# EAGLE board EXP (EAGLE 5.11)
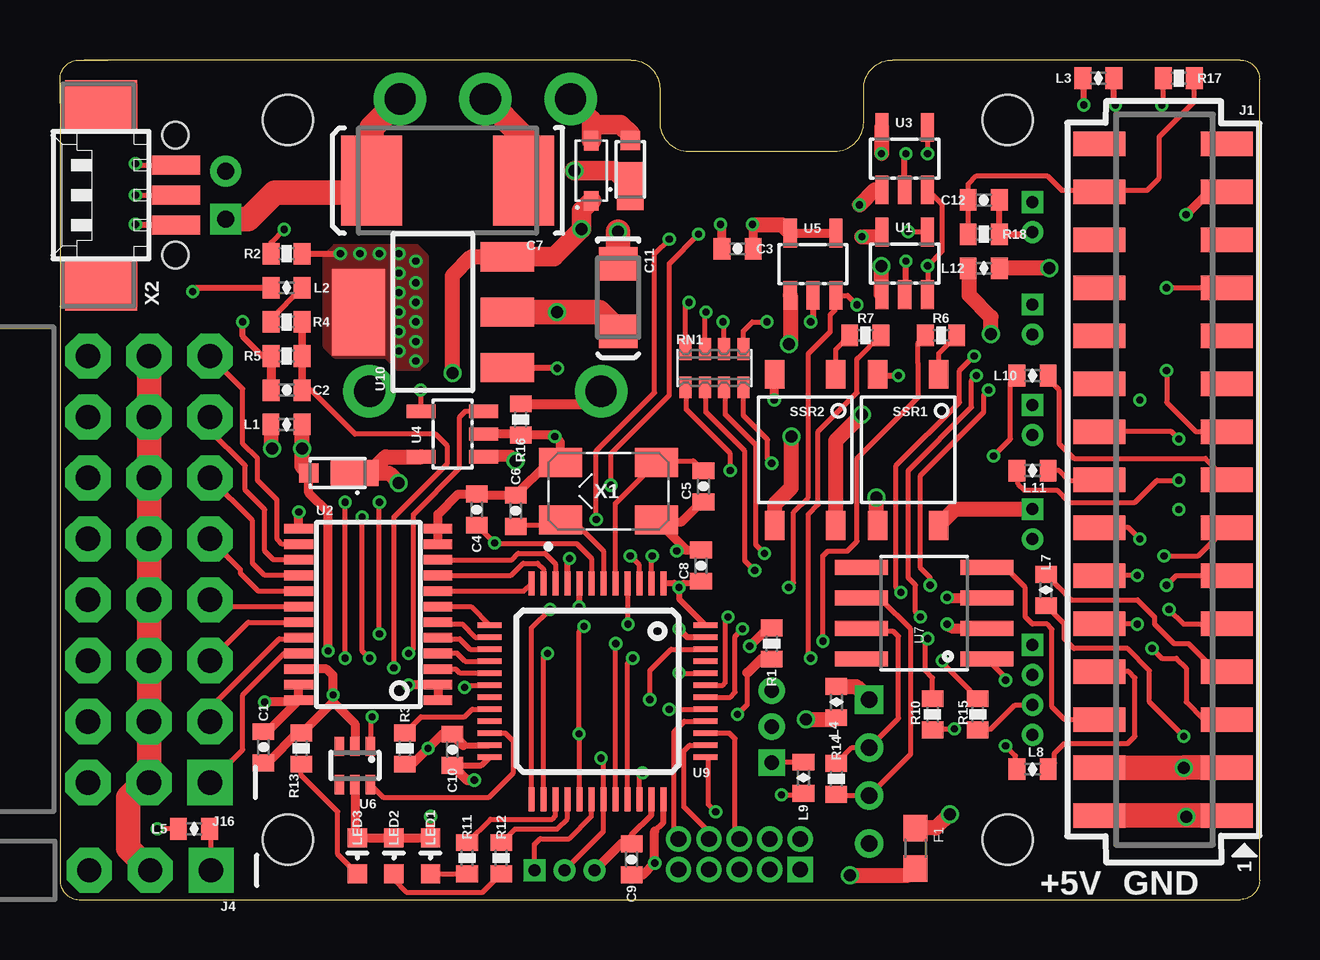
[diagram p0: board, top side]
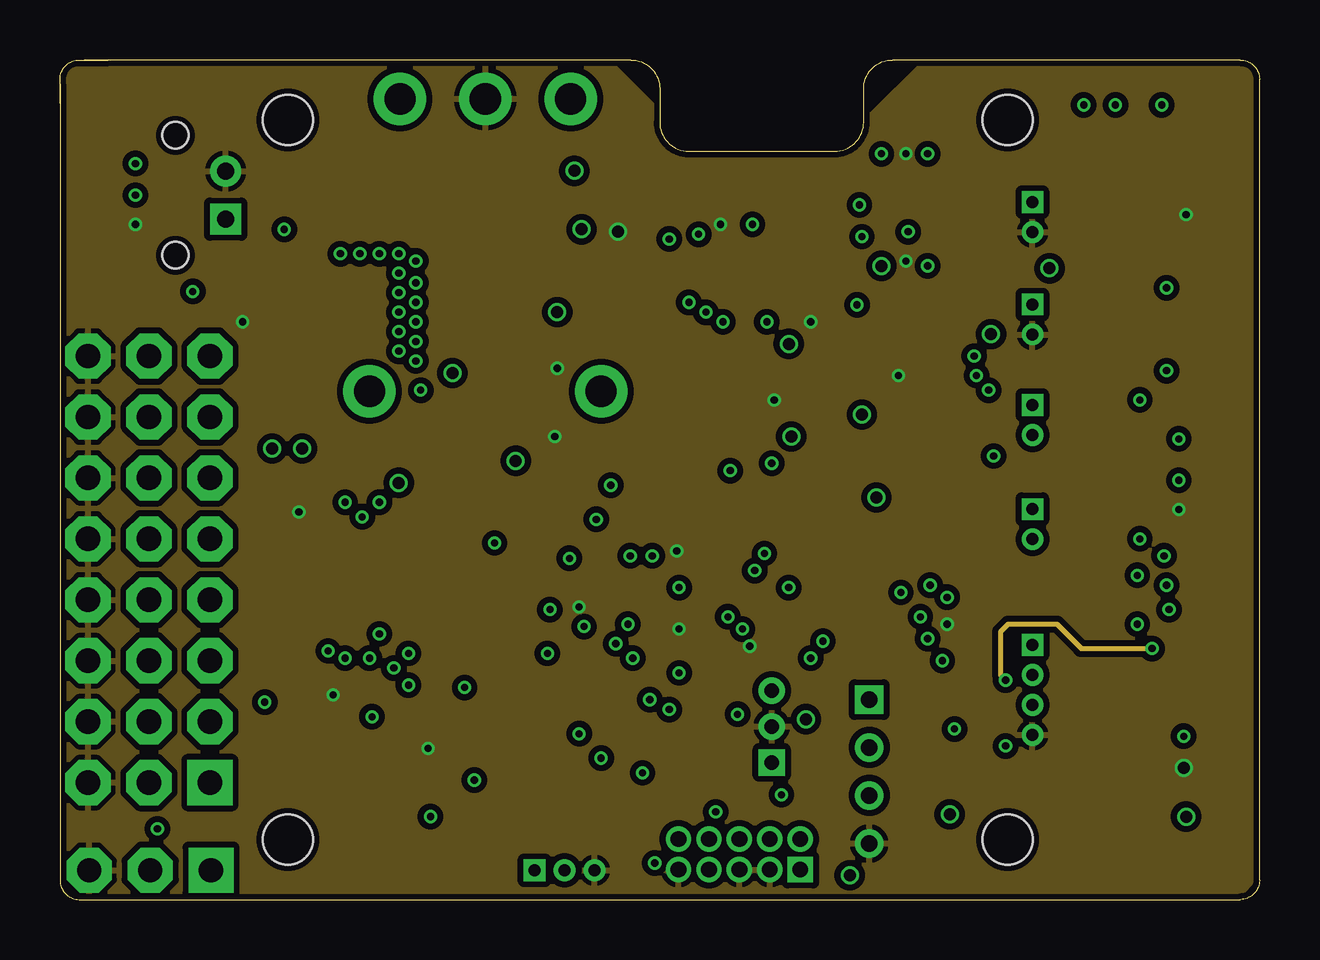
[diagram p1: board, inner layer Route2]
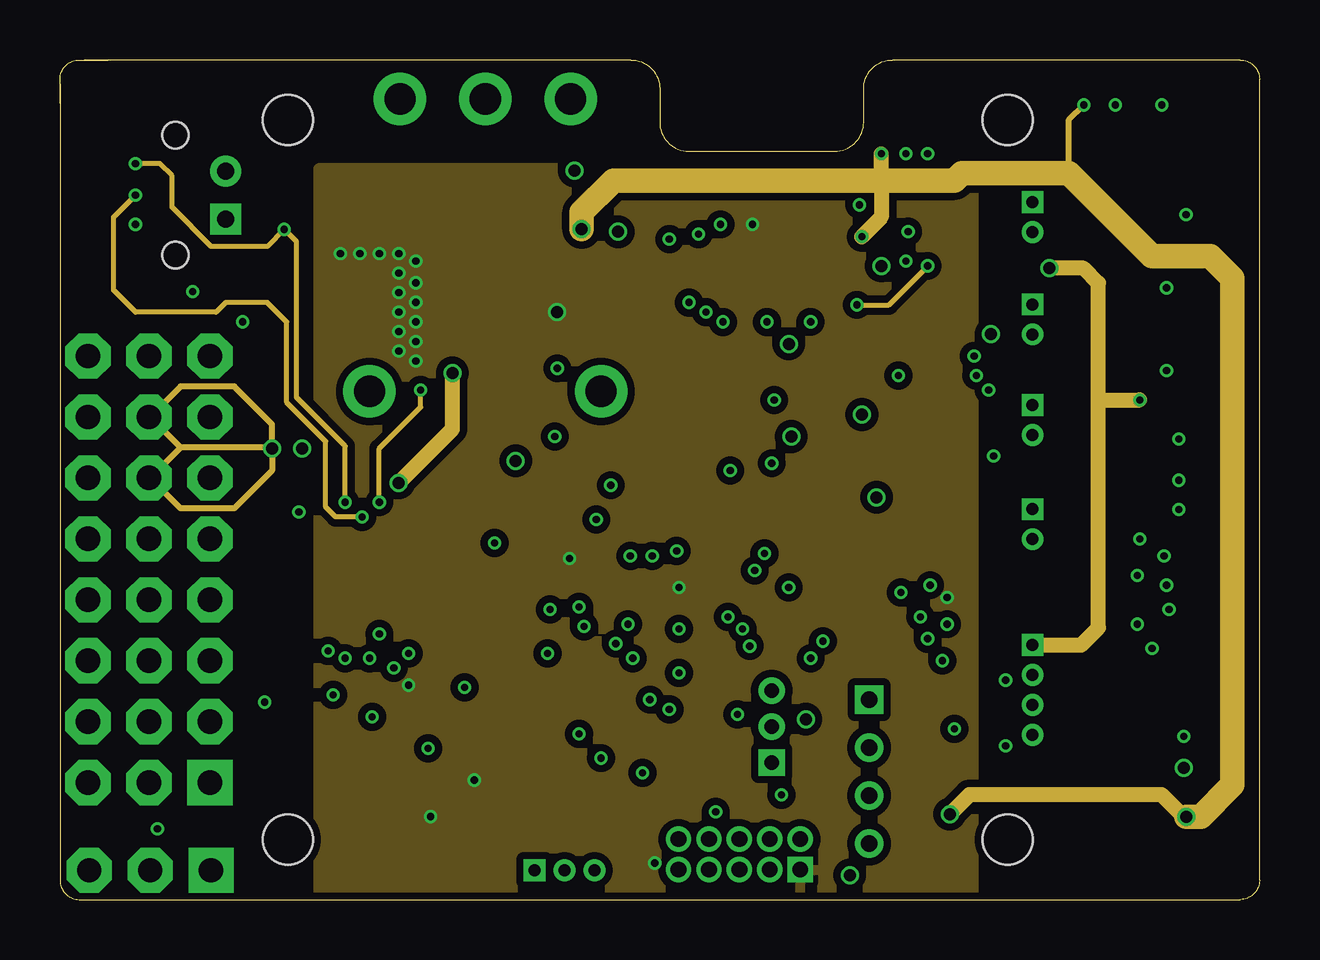
[diagram p2: board, inner layer Route15]
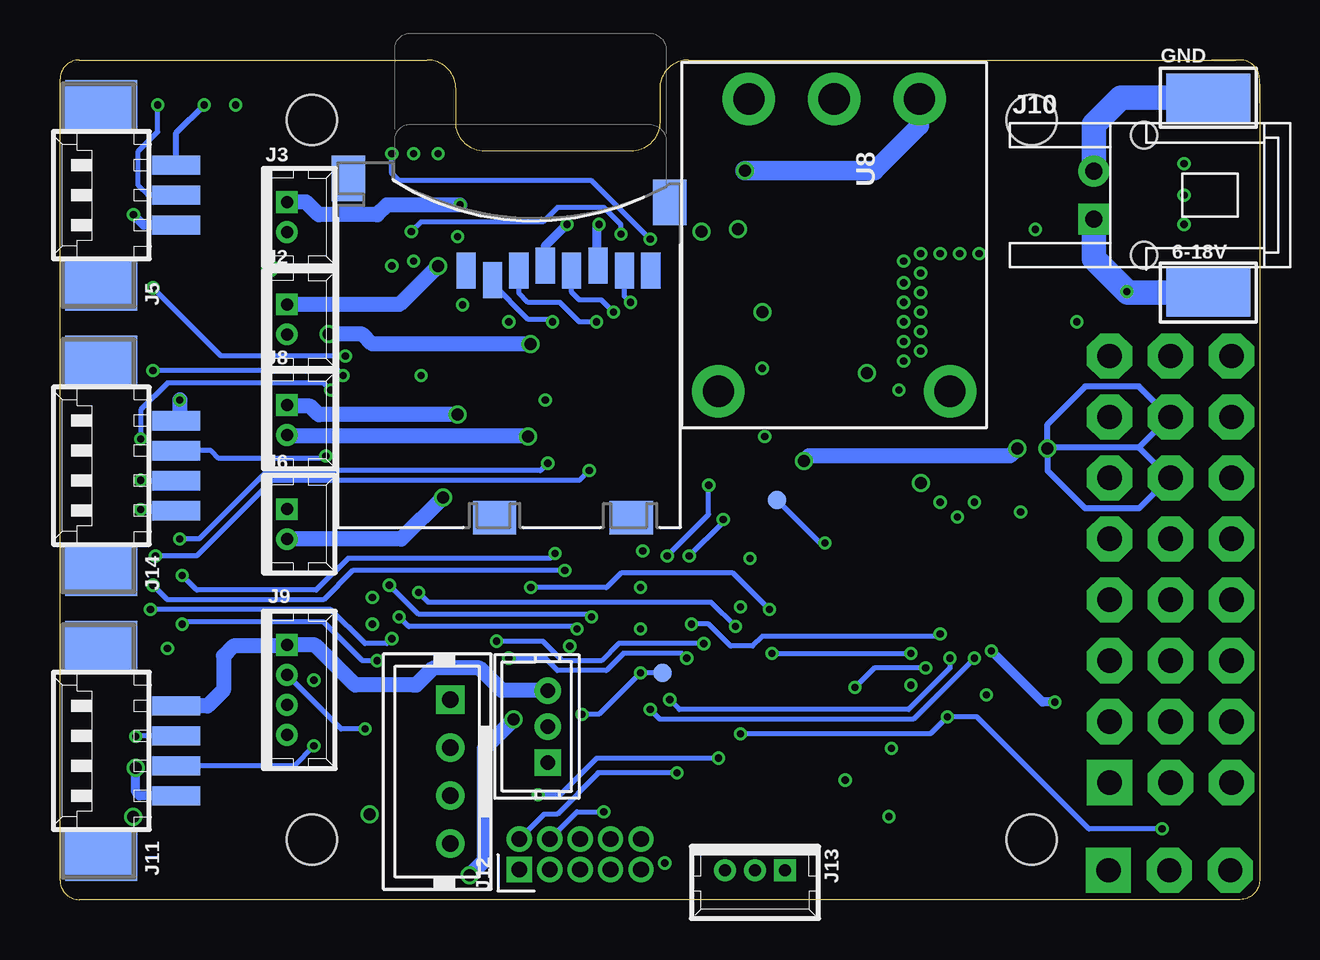
[diagram p3: board, bottom side, seen from below]

Size 50 x 35 mm. Coordinates in mm from the lower left corner, seen from the top.
Outline: 0,33.2 0,34.2 arc-90 0.8,35 2,35
Outline: 0,34 0,0.8 arc90 0.8,0 49.2,0 arc90 50,0.8 50,34.2 arc90 49.2,35 34.7,35 arc90 33.5,33.8 33.5,32.4 arc-90 32.3,31.2 26.2,31.2 arc-90 25,32.4 25,33.8 arc90 23.8,35 1,35
Copper layers (1*2*15*16): Top 0.035mm / dielectric 0.5mm / Route2 0.035mm / dielectric 0.5mm / Route15 0.035mm / dielectric 0.5mm / Bottom 0.035mm
Design rules "pixhawk2 *": minimum track width 0.15mm, minimum drill 0.3mm, track to track 0.15mm, track to pad 0.15mm, pad to pad 0.15mm, via to via 0.15mm, smd to smd 0.15mm, copper to edge 0.2mm, drill to drill 0.2mm, minimum pad ring 0.125mm, minimum via ring 0.125mm, stop-mask expansion 0.075mm, vias tented up to drill 0.31mm, thermal gap 8mil
Net classes: 0 default: width 0.203 mm, clearance 0.203 mm; 1 power: width 0.254 mm, drill 0.3 mm, clearance 0.203 mm

## Footprints (pad centres in the part's own frame; a part is rotated, then mirrored left to right if it is on the bottom)
3,5-2 = smd 2 x 3.5: 1 0,0
0402-CAP = smd 0.7 x 0.9: 1 -0.65,0; 2 0.65,0
EIA7343 = smd 2.55 x 3.75: A 3.17,0; C -3.17,0
EIA3216 = smd 1.4 x 1.6: A 1.4,0; C -1.4,0
MICROSMP = smd 0.8 x 0.8: ANODE 0.65,0 | smd 2 x 1.1: CATHODE -1.25,0
SOD323 = smd 0.8 x 0.6: A 1.25,0; C -1.25,0
0603 = smd 1.1 x 1: 1 -0.85,0; 2 0.85,0
HEADER_2MM_2X15_REVERSE = smd 1.02 x 2.16: 1 -14,-2.655; 2 -14,2.655; 3 -12,-2.655; 4 -12,2.655; 5 -10,-2.655; 6 -10,2.655; 7 -8,-2.655; 8 -8,2.655; 9 -6,-2.655; 10 -6,2.655; 11 -4,-2.655; 12 -4,2.655; 13 -2,-2.655; 14 -2,2.655; 15 0,-2.655; 16 0,2.655; 17 2,-2.655; 18 2,2.655; 19 4,-2.655; 20 4,2.655; 21 6,-2.655; 22 6,2.655; 23 8,-2.655; 24 8,2.655; 25 10,-2.655; 26 10,2.655; 27 12,-2.655; 28 12,2.655; 29 14,-2.655; 30 14,2.655
53047-02 = drill 0.5 pad 0.9 square: 1 -0.625,0 | drill 0.5 pad 0.9 round: 2 0.625,0
3X1RA = drill 1.016 pad 1.88 square: 1 -5.08,0 | drill 1.016 pad 1.88 octagon: 2 -2.54,0; 3 0,0
53261-03 = smd 0.8 x 2: 1 1.25,-2.5; 2 0,-2.5; 3 -1.25,-2.5 | smd 2.1 x 3: S1 3.75,0.625; S2 -3.75,0.625
B3B-ZR = drill 0.6 pad 1.1 square: 1 -1.5,0 | drill 0.6 pad 1.1 round: 2 0,0; 3 1.5,0
53047-04 = drill 0.5 pad 0.9 square: 1 -1.875,0 | drill 0.5 pad 0.9 round: 2 -0.625,0; 3 0.625,0; 4 1.875,0
S02B-PASK-2 = drill 0.7 pad 1.3 square: 1 1,0 | drill 0.7 pad 1.3 round: 2 -1,0 | hole 1.1: -2.5,2.1; 2.5,2.1
53261-04 = smd 0.8 x 2: 1 1.875,-2.5; 2 0.625,-2.5; 3 -0.625,-2.5; 4 -1.875,-2.5 | smd 2.1 x 3: S1 4.375,0.625; S2 -4.375,0.625
FTSH-105-01-XXX-DV = drill 0.65 pad 1.06 square: 1 0,0 | drill 0.65 pad 1.06 round: 2 0,1.27; 3 1.27,0; 4 1.27,1.27; 5 2.54,0; 6 2.54,1.27; 7 3.81,0; 8 3.81,1.27; 9 5.08,0; 10 5.08,1.27
53047-03 = drill 0.5 pad 0.9 square: 1 -1.25,0 | drill 0.5 pad 0.9 round: 2 0,0; 3 1.25,0
B4B-PH-K-S = drill 0.7 pad 1.2 square: 1 6,0 | drill 0.7 pad 1.2 round: 2 4,0; 3 2,0; 4 0,0
3X8RA = drill 1.016 pad 1.88 square: 1 -1.27,8.89 | drill 1.016 pad 1.88 octagon: 2 1.27,8.89; 3 3.81,8.89; 4 -1.27,6.35; 5 1.27,6.35; 6 3.81,6.35; 7 -1.27,3.81; 8 1.27,3.81; 9 3.81,3.81; 10 -1.27,1.27; 11 1.27,1.27; 12 3.81,1.27; 13 -1.27,-1.27; 14 1.27,-1.27; 15 3.81,-1.27; 16 -1.27,-3.81; 17 1.27,-3.81; 18 3.81,-3.81; 19 -1.27,-6.35; 20 1.27,-6.35; 21 3.81,-6.35; 22 -1.27,-8.89; 23 1.27,-8.89; 24 3.81,-8.89
0402-IND = smd 0.7 x 0.9: 1 -0.65,0; 2 0.65,0
LED-0603 = smd 0.8 x 0.8: A 0,-0.75; C 0,0.75
MICROSD = smd 0.8 x 1.5: 1 -1.94,2.7; 2 -0.84,2.3; 3 0.26,2.7; 4 1.36,2.9; 5 2.46,2.7; 6 3.56,2.9; 7 4.66,2.7; 8 5.76,2.7 | smd 1.4 x 1.9: NC -6.85,6.55; NC3 6.55,5.55 | smd 1.8 x 1.4: NC1 -0.75,-7.6; NC2 4.95,-7.6
0402-RES = smd 0.7 x 0.9: 1 -0.65,0; 2 0.65,0
CTS742C083 = smd 0.5 x 0.9: 1 -1.2,-0.8; 2 -0.4,-0.8; 3 0.4,-0.8; 4 1.2,-0.8; 5 1.2,0.8; 6 0.4,0.8; 7 -0.4,0.8; 8 -1.2,0.8
SOP4-2.54 = smd 0.8 x 1.2: 1 -1.27,-3.15; 2 1.27,-3.15; 3 1.27,3.15; 4 -1.27,3.15
PAD.03X.03 = smd 0.762 x 0.762: P$1 0,0
SOT23-5L = smd 0.55 x 1.2: 1 -0.95,-1.3; 2 0,-1.3; 3 0.95,-1.3; 4 0.95,1.3; 5 -0.95,1.3
R-PDSO-G24 = smd 0.4 x 1.2: 1 -3.575,-2.9; 2 -2.925,-2.9; 3 -2.275,-2.9; 4 -1.625,-2.9; 5 -0.975,-2.9; 6 -0.325,-2.9; 7 0.325,-2.9; 8 0.975,-2.9; 9 1.625,-2.9; 10 2.275,-2.9; 11 2.925,-2.9; 12 3.575,-2.9; 13 3.575,2.9; 14 2.925,2.9; 15 2.275,2.9; 16 1.625,2.9; 17 0.975,2.9; 18 0.325,2.9; 19 -0.325,2.9; 20 -0.975,2.9; 21 -1.625,2.9; 22 -2.275,2.9; 23 -2.925,2.9; 24 -3.575,2.9
SOT363_PHILIPS = smd 0.4 x 0.8: 1 -0.65,-0.8; 2 0,-0.8; 3 0.65,-0.8; 4 0.65,0.8; 5 0,0.8; 6 -0.65,0.8
SO08 = smd 0.61 x 2.21: 1 -1.905,-2.616; 2 -0.635,-2.616; 3 0.635,-2.616; 4 1.905,-2.616; 5 1.905,2.616; 6 0.635,2.616; 7 -0.635,2.616; 8 -1.905,2.616
PTH08080W_TH = drill 1.3 pad 2.184 round: 1 -6.096,3.556; 2 -6.096,0; 3 -6.096,-3.556; 4 6.096,-4.826; 5 6.096,4.826
TQFP48 = smd 0.24 x 1: 1 -2.75,-4.5; 2 -2.25,-4.5; 3 -1.75,-4.5; 4 -1.25,-4.5; 5 -0.75,-4.5; 6 -0.25,-4.5; 7 0.25,-4.5; 8 0.75,-4.5; 9 1.25,-4.5; 10 1.75,-4.5; 11 2.25,-4.5; 12 2.75,-4.5; 25 2.75,4.5; 26 2.25,4.5; 27 1.75,4.5; 28 1.25,4.5; 29 0.75,4.5; 30 0.25,4.5; 31 -0.25,4.5; 32 -0.75,4.5; 33 -1.25,4.5; 34 -1.75,4.5; 35 -2.25,4.5; 36 -2.75,4.5 | smd 1 x 0.24: 13 4.5,-2.75; 14 4.5,-2.25; 15 4.5,-1.75; 16 4.5,-1.25; 17 4.5,-0.75; 18 4.5,-0.25; 19 4.5,0.25; 20 4.5,0.75; 21 4.5,1.25; 22 4.5,1.75; 23 4.5,2.25; 24 4.5,2.75; 37 -4.5,2.75; 38 -4.5,2.25; 39 -4.5,1.75; 40 -4.5,1.25; 41 -4.5,0.75; 42 -4.5,0.25; 43 -4.5,-0.25; 44 -4.5,-0.75; 45 -4.5,-1.25; 46 -4.5,-1.75; 47 -4.5,-2.25; 48 -4.5,-2.75
SOT-223 = smd 1.219 x 2.235: 1 -2.311,-3.099; 2 0,-3.099; 3 2.311,-3.099 | smd 3.6 x 2.2: 4 0,3.099
MOUNT-HOLE2.1 = hole 2.1: 0,0
OSCILLATOR-5.0X3.2 = smd 1.8 x 1.2: 1 -2,-1.2; 2 2,-1.2; 3 2,1.2; 4 -2,1.2

## Placement (x,y rotation side)
6-18V  [3,5-2]  2.13,25.3 90 bottom
C1  0u1  [0402-CAP]  8.48,6.35 270 top
C2  0u1  [0402-CAP]  9.45,21.23 180 top
C3  2u2  [0402-CAP]  28.24,27.13 180 top
C4  0u1  [0402-CAP]  17.37,16.26 90 top
C5  10n  [0402-CAP]  26.82,17.22 270 top
C6  10n  [0402-CAP]  19,16.21 270 top
C7  100u  [EIA7343]  16.15,29.97 180 top
C8  0u1  [0402-CAP]  26.72,13.92 90 top
C9  0u1  [0402-CAP]  23.83,1.68 90 top
C10  0u1  [0402-CAP]  16.36,6.25 90 top
C11  4u7  [EIA3216]  23.27,25.1 270 top
C12  0u1  [0402-CAP]  38.51,29.16 0 top
D1  DIODE-SCHOTTKY_MSMP  [MICROSMP]  11.02,17.78 180 top
D2  DIODE-SCHOTTKY_SOD323  [SOD323]  22.15,30.38 90 top
D3  DIODE-SCHOTTKY_MSMP  [MICROSMP]  23.77,30.99 90 top
F1  500mA  [0603]  35.66,2.13 270 top
GND  [3,5-2]  2.13,33.43 270 bottom
J1  HEADER_2X15-REV  [HEADER_2MM_2X15_REVERSE]  45.97,17.51 90 top
J2  Accessory 1  [53047-02]  40.54,24.18 270 bottom
J3  Accessory 2  [53047-02]  40.54,28.45 270 bottom
J4  HEADER-3X1  [3X1RA]  1.22,1.22 180 top
J5  53261-03  [53261-03]  47.65,29.36 90 bottom
J6  Relay 1  [53047-02]  40.54,15.65 270 bottom
J7  CONN_SPEKTRUM_RX-TH  [B3B-ZR]  29.67,7.21 90 bottom
J8  Relay 2  [53047-02]  40.54,19.99 270 bottom
J9  53047-04  [53047-04]  40.54,8.74 270 bottom
J10  JST-PA-02  [S02B-PASK-2]  6.91,29.36 270 bottom
J11  53261-04  [53261-04]  47.65,6.2 90 bottom
J12  ARM_MINI_JTAG-TH  [FTSH-105-01-XXX-DV]  30.86,1.24 0 bottom
J13  [53047-03]  21.03,1.22 180 bottom
J14  53261-04  [53261-04]  47.65,18.08 90 bottom
J15  CONN_CAN-TH  [B4B-PH-K-S]  33.73,2.34 90 bottom
J16  HEADER-3X8SERVO  [3X8RA]  4.98,13.77 180 top
L1  FERRITE  [0402-IND]  9.44,19.81 0 top
L2  FERRITE  [0402-IND]  9.45,25.5 180 top
L3  FERRITE  [0402-IND]  43.28,34.24 0 top
L4  FERRITE  [0402-IND]  32.36,8.23 90 top
L5  FERRITE  [0402-IND]  5.59,2.95 0 top
L7  FERRITE  [0402-IND]  41.1,12.9 270 top
L8  FERRITE  [0402-IND]  40.54,5.44 180 top
L9  FERRITE  [0402-IND]  30.99,5.08 90 top
L10  FERRITE  [0402-IND]  40.54,21.84 180 top
L11  FERRITE  [0402-IND]  40.54,17.88 180 top
L12  FERRITE  [0402-IND]  38.51,26.31 0 top
LED1  BLUE  [LED-0603]  15.44,1.83 180 top
LED2  AMBER  [LED-0603]  13.92,1.83 180 top
LED3  GREEN  [LED-0603]  12.4,1.83 180 top
MICROSD  SF-MICROSD  [MICROSD]  31.13,23.52 0 bottom
R1  10K  [0402-RES]  29.67,10.67 90 top
R2  1K  [0402-RES]  9.45,26.92 0 top
R3  10K  [0402-RES]  14.38,6.3 270 top
R4  39K/1%  [0402-RES]  9.45,24.08 180 top
R5  10K/1%  [0402-RES]  9.45,22.66 0 top
R6  470R  [0402-RES]  36.73,23.52 0 top
R7  470R  [0402-RES]  33.57,23.52 180 top
R10  100R  [0402-RES]  36.37,7.72 270 top
R11  82R  [0402-RES]  16.97,1.73 270 top
R12  270R  [0402-RES]  18.39,1.73 270 top
R13  270R  [0402-RES]  10.06,6.3 270 top
R14  120R  [0402-RES]  32.36,5.03 270 top
R15  100R  [0402-RES]  38.25,7.72 270 top
R16  205R  [0402-RES]  19.2,20.02 90 top
R17  10K/1%  [0402-RES]  46.63,34.24 180 top
R18  10K/1%  [0402-RES]  38.51,27.74 180 top
RN1  100R  [CTS742C083]  27.28,22.15 0 top
SSR1  TLP3123(F)  [SOP4-2.54]  35.36,18.75 180 top
SSR2  TLP3123(F)  [SOP4-2.54]  31.06,18.75 180 top
TP1  PAD.03  [PAD.03X.03]  20.12,16.66 0 bottom
TP2  PAD.03  [PAD.03X.03]  24.89,9.45 0 bottom
U1  TPS2051B  [SOT23-5L]  35.2,26.52 0 top
U2  SN74LVC8T245  [R-PDSO-G24]  12.85,11.89 90 top
U3  TPS2051B  [SOT23-5L]  35.2,30.89 0 top
U4  TPS2061B  [SOT23-5L]  16.36,19.41 90 top
U5  TPS2051B  [SOT23-5L]  31.39,26.49 0 top
U6  74LVC2GU04  [SOT363_PHILIPS]  12.29,5.59 180 top
U7  SN65HVD232  [SO08]  36.02,11.94 90 top
U8  PTH08080WAH  [PTH08080W_TH]  17.73,27.28 270 bottom
U9  STM32F10XCXT6  [TQFP48]  22.4,8.69 180 top
U10  LD1117AS33  [SOT-223]  15.54,24.49 90 top
U$2  MOUNT-HOLE2.1MM  [MOUNT-HOLE2.1]  39.5,32.5 0 top
U$3  MOUNT-HOLE2.1MM  [MOUNT-HOLE2.1]  9.5,32.5 0 top
U$4  MOUNT-HOLE2.1MM  [MOUNT-HOLE2.1]  39.5,2.5 0 top
U$5  MOUNT-HOLE2.1MM  [MOUNT-HOLE2.1]  9.5,2.5 0 top
X1  [OSCILLATOR-5.0X3.2]  22.86,17.02 0 top
X2  [53261-03]  2.34,29.36 90 top

## Library data of the parts
6-18V GND TP1 TP2 U$2-U$5 = pixhawk2; BOM: EXCLUDE; PARTNO: *
C1 C2 C4 C8-C10 C12 = pixhawk2; PARTNO: CC0402ZRY5V7BB104
C3 = pixhawk2; PARTNO: C1608Y5V1C225Z
C5 C6 = pixhawk2; PARTNO: CC0402KRX7R7BB103
C7 = pixhawk2; PARTNO: T491X107K025ZT
C11 = pixhawk2; PARTNO: T491A475K010AT
D1-D3 = pixhawk2; PARTNO: MSS1P4-M3/89A
F1 = pixhawk2; PARTNO: MF-FSMF050X-2
J1 = pixhawk2; PARTNO: 951230-2520-AR-PR
J2 J3 J6 J8 = pixhawk2; PARTNO: 53047-02
J4 = pixhawk2; BOM: EXCLUDE; PARTNO: 53047-02
J5 X2 = pixhawk2; PARTNO: 53261-03
J7 = pixhawk2; PARTNO: B3B-ZR
J9 = pixhawk2; PARTNO: 53047-04
J10 = pixhawk2; PARTNO: S02B-PASK-2
J11 J14 = pixhawk2; PARTNO: 53261-04
J12 = pixhawk2; PARTNO: M50-3900542
J13 = pixhawk2; PARTNO: 53047-03
J15 = pixhawk2; PARTNO: B4B-PH-K
J16 = pixhawk2; PARTNO: *
L1-L5 L7-L12 = pixhawk2; PARTNO: BKP1005HS121-T
LED1 = pixhawk2; PARTNO: LNJ937W8CRA
LED2 = pixhawk2; PARTNO: LNJ437W84RA
LED3 = pixhawk2; PARTNO: LNJ337W83RA
MICROSD = pixhawk2; PARTNO: 101-00660-68-6
R1 R3 R5 R17 R18 = pixhawk2; PARTNO: RMCF0402FT10K0
R2 R11 = pixhawk2; PARTNO: MCR01MZPJ820
R4 = pixhawk2; PARTNO: RC0402FR-0739K2L
R6 R7 = pixhawk2; PARTNO: RMCF0402JT470R
R10 R15 = pixhawk2; PARTNO: RMCF0402JT100R
R12 R13 = pixhawk2; PARTNO: MCR01MZPJ271
R14 = pixhawk2; PARTNO: P120JCT-ND
R16 = pixhawk2; PARTNO: ERJ-2RKF2050X
RN1 = pixhawk2; OC_FARNELL: unknown; OC_NEWARK: unknown; PARTNO: TC164-JR-07100RL
SSR1 SSR2 = pixhawk2; PARTNO: TLP3123(F)
U1 U3-U5 = pixhawk2; PARTNO: AP2151WG-7
U2 = pixhawk2; PARTNO: SN74LVC8T245DBQR
U6 = pixhawk2; PARTNO: 74LVC2GU04GW,125
U7 = pixhawk2; PARTNO: AMIS42673ICAG1RG
U8 = pixhawk2; PARTNO: PTH08080WAH
U9 = pixhawk2; PARTNO: STM32F100C6T6B
U10 = pixhawk2; PARTNO: LD1117AS33
X1 = pixhawk2; PARTNO: ABM3B-8.000MHZ-10-1-U-T

## Nets
!JTRESET: J12.10 U9.40
ACC1_PWR_EN: U1.4 U9.2
ACC2_PWR_EN: U3.4 U9.3
ACC_OC_DETECT: U1.3 U3.3 U5.3 U9.25
ACC_POWER [power]: J7.3 J9.1 J11.1 J14.1 L12.2
ADC1_IN8: C2.1 R4.1 R5.2 U9.18
ADC1_IN9: U9.19
ANALOG1: C12.1 J1.28 R17.1 R18.2
ANALOG2: J1.29
ANALOG3: J1.30
BB_GPIO1: J1.24
BB_GPIO2: J1.25
BB_I2C2_SCL: J1.17 U9.42
BB_I2C2_SDA: J1.18 U9.43
BB_I2C3_SCL: J1.9 R10.1
BB_I2C3_SDA: J1.10 R15.1
BB_PC8: J1.26
BB_SPI3_MISO: J1.13 RN1.1
BB_SPI3_MOSI: J1.12 RN1.3
BB_SPI3_NSS: J1.14 RN1.4
BB_SPI3_SCK: J1.11 RN1.2
BB_UART5_RX: J1.16 L11.1
BB_UART5_TX: J1.15 L10.1
BB_USART1_RX: J1.8 L8.1
BB_USART1_TX: J1.7 L7.1
BB_USART2_CTS: J1.19
BB_USART2_RTS: J1.20
BB_USART2_RX: J1.22
BB_USART2_TX: J1.21
BOOT0: R1.1 TP2.P$1 U9.44
CAN1_RX: J1.6 U7.4
CAN1_TX: J1.5 U7.1
GND [power]: C1.2 C2.2 C3.2 C4.2 C5.2 C6.1 C7.C C8.2 C9.2 C10.2 C11.C C12.2 GND.1 J1.3 J1.4 J1.27 J2.2 J3.2 J4.3 J5.3 J7.2 J9.4 J10.2 J11.4 J12.3 J12.5 J12.9 J13.3 J14.4 J15.4 J16.3 J16.6 J16.9 J16.12 J16.15 J16.18 J16.21 J16.24 MICROSD.6 R1.2 R3.2 R5.1 R13.1 R16.1 R18.1 SSR1.2 SSR2.2 U1.2 U2.11 U2.12 U2.13 U2.22 U3.2 U4.2 U5.2 U6.2 U7.2 U8.2 U9.8 U9.23 U9.35 U9.47 U10.1 X1.2 X1.4 X2.3
J6-DATA: J7.1 L9.2
JTCK-SWCLK: J12.4 U9.37
JTDI: J12.8 U9.38
JTDO: J12.6 U9.39
JTMS-SWDIO: J12.2 U9.34
LED1: R11.1 U9.27
LED2: R12.1 U9.28
LED3: U9.46 X2.2
N$1: R7.2 SSR2.1
N$2: R6.2 SSR1.1
N$3: MICROSD.7 RN1.8
N$4 [power]: L12.1 U5.1
N$5: C6.2 U9.6 X1.1
N$6: C5.1 U9.5 X1.3
N$7: L2.1 R4.2
N$8: LED1.C R11.2
N$9: R16.2 U8.4
N$10: J4.1 L5.2
N$11: MICROSD.5 RN1.7
N$12: MICROSD.3 RN1.6
N$13: MICROSD.2 RN1.5
N$14: F1.2 L4.1
N$15: J5.2 R17.2
N$19: J14.3 L11.2
N$21 [power]: J8.1 SSR2.4
N$22 [power]: J8.2 SSR2.3
N$23 [power]: J6.2 SSR1.3
N$24 [power]: J6.1 SSR1.4
N$25: J14.2 L10.2
N$26: J11.3 L8.2
N$27: J9.3 R15.2
N$28: J9.2 R10.2
N$29 [power]: J2.1 U1.1
N$30 [power]: J3.1 U3.1
N$31: LED2.C R12.2
N$37: U9.45
N$38: LED3.C R13.2
N$41: J11.2 L7.2
N$43: J15.2 R14.1 U7.7
N$44: J15.3 R14.2 U7.6
N$47 [power]: J15.1 L4.2
NRST: C4.1 TP1.P$1 U9.7
PA0: U2.10 U9.10
PA1: U2.9 U9.11
PA2: U2.8 U9.12
PA3: U2.7 U9.13
PA4: U2.6 U9.14
PA5: U2.5 U9.15
PA6: U2.4 U9.16
PA7: U2.3 U9.17
PB2-BOOT1: R3.1 U9.20
PPM1: J16.22 U2.14
PPM2: J16.19 U2.15
PPM3: J16.16 U2.16
PPM4: J16.13 U2.17
PPM5: J16.10 U2.18
PPM6: J16.7 U2.19
PPM7: J16.4 U2.20
PPM8: J16.1 U2.21
PPM_INPUT: J1.23 L5.1 U6.1 U9.29
RELAY1: R6.1 U9.32
RELAY2: R7.1 U9.33
SAFETY: R2.1 U9.41 X2.1
SERVO_OC_DETECT: U4.3 U9.26
SERVO_PWR_EN: U4.4 U9.4
USART1_RX: J13.2 L9.1 U9.31
USART1_TX: J13.1 U9.30
USART3_RX: U6.6 U9.22
USART3_TX: U9.21
VDD_3V3 [power]: C3.1 C8.1 C9.1 C10.1 C11.A J12.1 LED1.A LED2.A LED3.A MICROSD.4 R2.2 U2.1 U2.2 U5.4 U5.5 U6.5 U7.3 U9.1 U9.9 U9.24 U9.36 U9.48 U10.2 U10.4
VDD_5V [power]: D1.CATHODE D2.C F1.1 J1.1 J1.2 L3.1 U1.5 U3.5 U4.5 U10.3
VDD_5V_ANALOG [power]: J5.1 L3.2
VDD_SERVO [power]: C1.1 D1.ANODE L1.2 U2.23 U2.24 U4.1
VDD_SERVO_EXT [power]: J4.2 J16.2 J16.5 J16.8 J16.11 J16.14 J16.17 J16.20 J16.23 L1.1
VIN [power]: 6-18V.1 C7.A D3.CATHODE J10.1 L2.2 U8.1
VOUT: D2.A D3.ANODE U8.3

## Tracks (layer width: path | path; a pad name or v marks a point on that pad's centre or on a via)
!JTRESET
  Top 0.203: U9.40 26.03,7.44 25.6,7.01 25.6,2.69 J12.10
ACC1_PWR_EN  (via drill 0.3)
  Top 0.203: U1.4 36.17,27.84 v35.36,27.84 | v26.62,27.74 25.4,26.52 25.4,21.03 22.96,18.59 v22.96,17.27 | v24.69,14.33 24.65,14.29 U9.2
  Bottom 0.203: v35.36,27.84 34.95,28.25 29.87,28.25 29.26,28.85 27.33,28.85 26.62,28.14 v26.62,27.74 | v22.96,17.27 22.96,16.05 v24.69,14.33
ACC2_PWR_EN  (via drill 0.3)
  Top 0.203: U3.4 36.23,32.11 36.17,32.11 v36.17,31.09 | v25.4,27.53 24.79,26.92 24.79,21.13 22.35,18.69 v22.35,15.85 | v23.77,14.33 24.15,13.95 U9.3
  Bottom 0.203: v22.35,15.85 22.35,15.75 v23.77,14.33 | v36.17,31.09 36.17,30.28 35.86,29.97 27.83,29.97 v25.4,27.53
ACC_OC_DETECT  (via drill 0.3)
  Top 0.203: U9.25 19.65,11.34 19.67,11.34 v20.42,12.09 | v30.38,13.01 30.58,13.21 30.58,16.15 31.19,16.76 31.19,22.76 32.11,23.67 32.11,24.38 32.34,24.62 U5.3 32.83,25.19 v33.22,24.79 | 36.29,25.22 U1.3 36.17,25.23 v36.17,26.42 36.78,27.03 36.78,28.96 U3.3
  Route15 0.203: v33.22,24.79 34.54,24.79 v36.17,26.42
  Bottom 0.203: v20.42,12.09 21.95,13.61 26.62,13.61 27.23,13.01 v30.38,13.01
ACC_POWER  (via drill 0.3, 0.5)
  Top 0.635: v41.25,26.31 L12.2
  Route15 0.635: v41.25,26.31 42.67,26.31 43.28,25.7 43.28,20.83 | 43.28,20.83 43.28,11.32 42.57,10.61 J9.1 | 43.28,20.83 v45.01,20.83
  Bottom 0.381: 45.01,20.1 J14.1 | 35.15,8.94 35.26,8.94
  Bottom 0.635: v45.01,20.83 45.01,20.1 | J7.3 31.57,8.71 32.51,9.65 34.44,9.65 35.15,8.94 | 35.26,8.94 37.69,8.94 39.37,10.61 J9.1 40.59,10.57 42.77,10.57 43.18,10.16 43.18,8.74 43.84,8.07 J11.1
ADC1_IN8  (via drill 0.3)
  Top 0.203: U9.18 16.96,8.94 v16.87,8.84 | C2.1 10.46,21.23 12.29,19.41 15.65,19.41 16.15,18.9 16.15,18.19 13.92,15.95 v13.92,9.65
  Top 0.305: R4.1 R5.2 C2.1
  Bottom 0.203: v13.92,9.65 16.05,9.65 v16.87,8.84
ANALOG1
  Top 0.203: R18.2 C12.1 37.86,29.83 38.2,30.18 41.15,30.18 41.76,29.57 43.26,29.57 J1.28 43.38,29.57 45.31,29.57 45.82,30.07 45.82,31.8 47.28,33.26 R17.1
BB_I2C2_SCL  (via drill 0.3)
  Top 0.203: J1.17 47.35,19.51 46.13,20.73 v46.13,22.05 | v38.2,21.84 38,21.64 38,20.52 35.36,17.88 35.36,13.41 35.66,13.11 35.66,11.99 v35.87,11.79 | v28.45,11.28 28.14,10.97 28.14,8.64 27.94,8.44 U9.42
  Bottom 0.203: v38.2,21.84 38.41,22.05 v46.13,22.05 | v28.45,11.28 28.55,11.38 35.46,11.38 v35.87,11.79
BB_I2C2_SDA  (via drill 0.3)
  Top 0.203: J1.18 46.33,19.51 v46.63,19.2 | v36.27,13.11 36.27,13.41 35.87,13.82 35.87,17.68 38.51,20.32 38.51,21.03 v38.71,21.23 | v27.84,11.79 27.74,11.68 27.74,9.04 27.63,8.94 U9.43
  Bottom 0.203: v46.63,19.2 46.63,20.42 45.52,21.54 39.01,21.54 v38.71,21.23 | v36.27,13.11 35.05,11.89 27.94,11.89 v27.84,11.79
BB_I2C3_SCL  (via drill 0.3)
  Top 0.203: v46.23,12.09 46.84,11.48 48.6,11.48 J1.9 | R10.1 36.37,9.25 36.07,9.55 36.07,10.77 v36.17,10.87
  Bottom 0.203: v36.17,10.87 36.37,10.67 37.29,10.67 38.71,12.09 v46.23,12.09
BB_I2C3_SDA  (via drill 0.3)
  Top 0.203: v44.91,11.48 43.29,11.48 J1.10 | v36.78,9.96 36.78,9.86 37.9,8.74 37.89,8.74 R15.1
  Bottom 0.203: v36.78,9.96 37.39,9.96 39.01,11.58 44.81,11.58 v44.91,11.48
BB_SPI3_MISO  (via drill 0.3)
  Top 0.203: J1.13 47.45,14.33 v46.02,14.33 | RN1.1 26.11,21.32 26.11,20.42 27.94,18.59 v27.94,17.88
  Bottom 0.203: v46.02,14.33 44.3,14.33 41.15,17.48 28.35,17.48 v27.94,17.88
BB_SPI3_MOSI  (via drill 0.3)
  Top 0.203: J1.12 | v44.91,13.51 J1.12 | J1.12 42.77,13.51 | v29.36,14.43 29,14.79 29,18.95 27.74,20.22 27.74,21.29 RN1.3
  Bottom 0.203: v29.36,14.43 29.57,14.22 38,14.22 39.32,12.9 44.3,12.9 v44.91,13.51
BB_SPI3_NSS  (via drill 0.3)
  Top 0.203: J1.14 44.54,15.51 v45.01,15.04 | v29.67,18.19 29.5,18.36 29.5,19.17 28.48,20.19 RN1.4
  Bottom 0.203: v45.01,15.04 44.2,15.04 41.35,17.88 29.97,17.88 v29.67,18.19
BB_SPI3_SCK  (via drill 0.3)
  Top 0.203: v28.96,13.72 28.55,14.12 28.55,18.69 26.92,20.32 26.92,21.3 RN1.2 | v46.13,13.11 46.53,13.51 J1.11
  Bottom 0.203: v28.96,13.72 37.8,13.72 39.01,12.5 45.52,12.5 v46.13,13.11
BB_UART5_RX
  Top 0.203: L11.1 41.66,17.88 42.06,17.48 43.29,17.48 J1.16
BB_UART5_TX
  Top 0.203: J1.15 47.75,18.39 42.27,18.39 41.66,19 41.66,21.23 41.19,21.7 L10.1
BB_USART1_RX
  Top 0.203: J1.8 44.54,9.51 44.81,9.25 44.81,6.81 44.5,6.5 41.86,6.5 41.45,6.1 41.45,5.7 L8.1
BB_USART1_TX
  Top 0.203: J1.7 48.2,9.51 47.04,10.67 46.43,10.67 45.62,11.48 45.62,11.79 44.91,12.5 42.16,12.5 41.66,13.01 41.65,13.01 L7.1
BOOT0  (via drill 0.3)
  Top 0.203: v25.81,9.45 25.82,9.44 U9.44 | 28.65,9.45 28.65,8.13 v28.25,7.72
  Top 0.406: R1.1 29.22,10.02 28.65,9.45
  Bottom 0.203: TP2.P$1 v25.81,9.45 27.53,7.72 v28.25,7.72
CAN1_RX
  Top 0.203: J1.6 41.87,7.51 41.35,8.03 41.35,11.28 41.15,11.48 40.54,11.48 40.23,11.79 40.23,13.01 39.52,13.72 38.76,13.72 U7.4
CAN1_TX  (via drill 0.3)
  Top 0.203: J1.5 47.66,7.51 46.94,8.23 46.94,9.65 46.53,10.06 45.92,10.06 v45.52,10.46 | v39.42,9.14 39.52,9.14 U7.1
  Route2 0.203: v45.52,10.46 42.57,10.46 41.55,11.48 39.52,11.48 39.22,11.18 39.22,9.35 v39.42,9.14
GND  (via drill 0.3, 0.5)
  Top 0.254: U9.35 24.65,3.52 23.82,2.69 C9.2 | 16.81,6.44 U9.23 | U3.2 35.2,31.04 v35.26,31.09 | U9.47 26.15,10.94 v25.81,11.28 | 35.26,25.27 v35.26,26.62 | 21.65,12.2 U9.8 | U5.2 31.39,24.18 v31.29,24.08 | SSR1.2 34.14,21.84 v34.95,21.84 | R5.1 8.43,22.66 7.62,23.47 v7.62,24.08 | X2.3 3.18,28.11 v3.15,28.14 | J3.2 40.45,27.74 R18.1 C12.2 | U10.1 20.73,22.17 v20.73,22.15
  Top 0.381: J13.3 23.39,2.33 C9.2 | J1.3 47.88,5.51 | C3.2 27.59,28.08 v27.53,28.14 | v46.94,28.55 47.9,29.51 J1.27 | R5.1 C2.2 | 11.38,8.23 10.06,6.91 R13.1 10,7.01 9.96,7.01 8.65,5.7 C1.2 | 11.38,8.23 v11.38,8.53 11.38,9.35 11.11,9.61 U2.22 | U6.2 12.29,7.32 11.38,8.23 | U2.11 U2.12 15.75,16.06 16.6,16.91 C4.2 17.42,16.86 C6.1 20.36,18.22 X1.4 20.86,19.07 v20.62,19.3 20.56,19.36 R16.1 19,19.36 18.96,19.41 U4.2 | 26.11,14.57 C8.2 | 26.11,14.57 X1.2 24.93,15.75 25.91,15.75 26.73,16.57 C5.2 | v31.29,24.08 v31.3,24.08 | U1.2 35.26,25.27 | SSR2.2 29.77,21.87 v29.77,20.83 | 26.11,14.57 25.75,14.57 v25.7,14.53 | R3.2 14.69,5.65 v15.34,6.3 15.94,6.9 C10.2 | U2.13 v9.96,16.15 | v21.64,12.19 21.65,12.2 | R1.2 29.5,11.32 v28.75,10.57
  Top 0.406: 16.81,6.44 16.81,6.45 C10.2 | U7.2 37.16,11.3 v36.98,11.48
  Top 1.016: C7.C 19.32,31.78 U8.2 | C11.C v23.27,27.84 | J1.4 43.34,5.49 v46.84,5.49 46.86,5.51 J1.3
  Bottom 0.381: J11.4 46.69,4.32 46.84,4.47 v46.84,5.49 | v27.53,28.14 27.64,28.04 27.64,26.48 MICROSD.6 | J5.3 46.5,28.11 v46.94,28.55 | J14.4 45.2,16.26 v46.63,16.26
  Bottom 1.016: GND.1 5.79,33.43 6.91,32.31 J10.2
  pour Route2 (isolate 0.254): 49.17,0.2 49.78,0.81 49.78,34.34 49.28,34.85 35.97,34.85 33.83,32.72 25.1,32.72 22.96,34.85 0.71,34.85 0.2,34.34 0.2,0.61 0.61,0.2
J6-DATA
  Top 0.203: L9.2 29.68,5.73 J7.1
JTCK-SWCLK  (via drill 0.3)
  Top 0.203: U9.37 27.03,5.81 27.03,3.96 v27.33,3.66
  Bottom 0.203: v27.33,3.66 28.45,3.66 J12.4
JTDI
  Top 0.203: U9.38 26.25,6.44 26.01,6.2 26.01,3.86 27.05,2.82 J12.8
JTDO
  Top 0.203: U9.39 27.91,6.94 28.14,6.71 28.14,2.69 J12.6
JTMS-SWDIO  (via drill 0.3)
  Top 0.203: U9.34 24.15,5.15 v24.28,5.28
  Bottom 0.203: v24.28,5.28 27.58,5.28 27.58,5.23 29.26,3.56 29.82,3.56 J12.2
LED1
  Top 0.203: U9.27 20.65,3.48 20.52,3.35 17.94,3.35 R11.1
LED2
  Top 0.203: U9.28 21.15,3.37 20.73,2.95 18.96,2.95 R12.1
LED3  (via drill 0.3)
  Top 0.203: v12.6,15.95 12.6,10.36 v12.9,10.06 | v24.59,8.33 24.59,9.55 25.47,10.44 U9.46 | v3.15,29.36 X2.2
  Route15 0.203: v12.6,15.95 11.48,15.95 11.07,16.36 11.07,19.1 9.45,20.73 9.45,24.08 8.64,24.89 6.91,24.89 6.5,24.49 3.15,24.49 2.23,25.4 2.23,28.45 v3.15,29.36
  Bottom 0.203: v12.9,10.06 12.9,9.65 14.63,7.92 24.18,7.92 v24.59,8.33
N$1
  Top 0.203: SSR2.1 32.33,22.94 R7.2
N$2
  Top 0.203: R6.2 36.63,22.77 SSR1.1
N$3  (via drill 0.3)
  Top 0.203: RN1.8 26.08,24.76 v26.21,24.89
  Bottom 0.203: MICROSD.7 26.47,25.15 v26.21,24.89
N$4  (via drill 0.5)
  Top 0.254: 30.44,23.23 v30.38,23.16 | 37.9,26.27 L12.1
  Top 0.635: U5.1 30.44,23.23 | v38.81,23.57 38.81,24.28 37.9,25.2 37.9,26.27
  Bottom 0.635: v30.38,23.16 36.98,23.16 37.39,23.57 v38.81,23.57
N$5
  Top 0.203: C6.2 19.06,15.62 20.66,15.62 X1.1 20.93,15.75 21.44,15.75 22.65,14.53 U9.6
N$6
  Top 0.203: U9.5 23.15,16.51 X1.3 24.79,18.29 26.41,18.29 C5.1
N$7
  Top 0.203: R4.2 8.8,24.2 L2.1
N$8
  Top 0.203: LED1.C R11.2
N$9
  Top 0.406: R16.2 22.04,20.66 U8.4
N$10
  Top 0.203: L5.2 6.3,2.88 J4.1
N$11  (via drill 0.3)
  Top 0.203: RN1.7 26.88,24.44 v26.92,24.49
  Bottom 0.203: MICROSD.5 28.67,25.32 28.35,24.99 27.43,24.99 v26.92,24.49
N$12  (via drill 0.3)
  Top 0.203: RN1.6 27.68,24.04 v27.64,24.08
  Bottom 0.203: MICROSD.3 30.87,25.29 30.48,24.89 29.16,24.89 28.35,24.08 v27.64,24.08
N$13  (via drill 0.3)
  Top 0.203: RN1.5 28.48,23.7 28.85,24.08 v29.46,24.08
  Bottom 0.203: MICROSD.2 31.97,25.68 30.48,24.18 29.57,24.18 v29.46,24.08
N$14  (via drill 0.5)
  Top 0.203: 32.3,7.52 L4.1
  Top 0.635: v31.09,7.52 32.3,7.52 | v32.92,1.02 35.36,1.02 35.62,1.28 F1.2
  Bottom 0.635: v31.09,7.52 32.31,6.3 32.31,1.63 v32.92,1.02
N$15  (via drill 0.3)
  Top 0.203: R17.2 45.98,33.18 v45.92,33.12
  Bottom 0.203: v45.92,33.12 45.92,32 46.74,31.19 46.74,29.77 46.33,29.36 J5.2
N$19  (via drill 0.3)
  Top 0.203: v46.63,17.48 45.72,17.48 44.81,16.56 42.06,16.56 41.55,17.07 40.19,17.07 39.93,17.33 39.93,17.84 L11.2
  Bottom 0.203: v46.63,17.48 46.62,17.46 J14.3
N$21  (via drill 0.5)
  Top 0.635: v33.43,20.22 32.33,19.13 SSR2.4
  Bottom 0.635: 40.54,20.62 J8.1 40.54,20.56 39.56,20.56 39.22,20.22 v33.43,20.22
N$22  (via drill 0.5)
  Top 0.635: v30.48,19.3 30.48,17.17 29.79,16.48 SSR2.3
  Bottom 0.254: v30.48,19.3 30.49,19.31
  Bottom 0.635: 30.49,19.31 40.54,19.31 | 40.54,19.31 40.54,19.3 | 40.54,19.31 J8.2
N$23  (via drill 0.5)
  Top 0.635: v34.04,16.76 34.04,15.65 SSR1.3
  Bottom 0.635: J6.2 35.78,15.02 v34.04,16.76
N$24
  Top 0.381: SSR1.4 36.68,15.65
  Top 0.635: 36.68,15.65 37.3,16.27 J6.1
N$25  (via drill 0.3)
  Top 0.203: v38.91,18.49 39.62,19.2 39.62,21.58 L10.2
  Bottom 0.203: J14.2 43.7,18.71 43.38,18.39 39.01,18.39 v38.91,18.49
N$26  (via drill 0.3)
  Top 0.203: v39.42,6.4 39.83,5.99 39.83,5.68 39.74,5.59 L8.2
  Bottom 0.203: J11.3 40.25,5.57 v39.42,6.4
N$27
  Top 0.203: J9.3 39.81,8.11 38.81,7.11 38.29,7.11 R15.2
N$28  (via drill 0.3)
  Top 0.203: R10.2 36.64,7.07 36.68,7.11 v37.29,7.11
  Bottom 0.203: v37.29,7.11 38.29,7.11 J9.2
N$29  (via drill 0.5)
  Top 0.254: U1.1 34.24,25.23
  Top 0.635: 34.24,25.23 v34.24,26.42
  Bottom 0.635: J2.1 35.85,24.81 v34.24,26.42
N$30  (via drill 0.3)
  Top 0.508: U3.1 33.95,29.59
  Top 0.635: 33.95,29.59 v33.33,28.96
  Bottom 0.635: v33.33,28.96 36.37,28.96 36.78,28.55 39.22,28.55 39.74,29.07 J3.1
N$31
  Top 0.203: R12.2 17.62,0.3 14.43,0.3 13.92,0.81 LED2.C
N$38
  Top 0.203: LED3.C 11.58,1.89 11.58,3.66 10.06,5.18 R13.2
N$41  (via drill 0.3)
  Top 0.203: v46.84,6.81 45.41,8.23 45.41,9.55 44.5,10.46 42.27,10.46 41.86,10.87 41.86,11.49 L7.2
  Bottom 0.203: J11.2 46.82,6.82 v46.84,6.81
N$43
  Top 0.203: R14.1 33.02,6.34 J15.2 34.95,7.56 34.95,10.97 34.75,11.18 33.53,11.18 U7.7
N$44
  Top 0.203: R14.2 32.4,4.34 J15.3 35.46,6.06 35.46,11.28 34.24,12.5 33.48,12.5 U7.6
N$47
  Top 0.635: J15.1 33.19,8.88 L4.2
NRST  (via drill 0.3)
  Top 0.203: U9.7 22.15,14.22 21.54,14.83 18.15,14.83 v18.11,14.86 C4.1
  Bottom 0.203: TP1.P$1 18.32,14.86 v18.11,14.86
PA0
  Top 0.203: U2.10 18.84,14.16 19.1,14.43 20.22,14.43 20.65,13.99 U9.10
PA1
  Top 0.203: U2.9 18.8,13.51 19.3,14.02 19.91,14.02 20.15,13.78 U9.11
PA2
  Top 0.203: U2.8 19.33,12.86 U9.12
PA3
  Top 0.203: U2.7 17.13,12.21 U9.13
PA4
  Top 0.203: U9.14 17.31,10.94 16.76,11.48 15.83,11.48 U2.6
PA5
  Top 0.203: U9.15 17.1,10.44 16.66,10.87 15.79,10.87 U2.5
PA6
  Top 0.203: U9.16 16.89,9.94 16.56,10.26 U2.4
PA7
  Top 0.203: U2.3 16.5,9.61 16.66,9.45 U9.17
PB2-BOOT1
  Top 0.203: R3.1 15.05,7.62 16.87,7.62 17.18,7.94 U9.20
PPM1
  Top 0.203: U2.14 9.27,14.81 9.04,15.04 9.04,16.66 8.23,17.48 8.23,18.39 7.62,19 7.62,21.29 J16.22
PPM2
  Top 0.203: J16.19 6.25,19.56 7.72,18.09 7.72,17.07 8.53,16.26 8.53,14.53 8.9,14.16 U2.15
PPM3
  Top 0.203: J16.16 8.03,15.8 8.03,14.02 8.54,13.51 U2.16
PPM4
  Top 0.203: J16.13 7.52,13.77 7.52,13.61 8.27,12.86 U2.17
PPM5
  Top 0.203: J16.10 6.53,12.21 U2.18
PPM6
  Top 0.203: J16.7 7.85,11.56 U2.19
PPM7
  Top 0.203: J16.4 6.25,7.98 9.14,10.87 9.91,10.87 U2.20
PPM8
  Top 0.203: J16.1 7.62,6.25 7.62,8.53 9.35,10.26 U2.21
PPM_INPUT  (via drill 0.3)
  Top 0.203: J1.23 v46.13,25.5 | v38.1,22.66 37.49,22.05 37.49,20.73 34.85,18.09 34.85,13.01 v35.05,12.8 | L5.1 v4.06,2.95 | U9.29 v21.64,6.91 21.64,11.18 v21.84,11.38 | U6.1 12.94,7.56 v13.01,7.62
  Bottom 0.203: v38.1,22.66 43.28,22.66 v46.13,25.5 | v35.05,12.8 34.65,12.39 22.86,12.39 v21.84,11.38 | v4.06,2.95 7.11,2.95 11.79,7.62 v13.01,7.62 13.72,6.91 v21.64,6.91
RELAY1  (via drill 0.3)
  Top 0.203: U9.32 23.15,10.66 v23.16,10.67 | v31.8,10.77 31.8,14.33 32,14.53 32.82,14.53 33.22,14.94 33.22,18.39 35.77,20.94 35.77,22.35 35.76,22.35 35.76,23.21 R6.1
  Bottom 0.203: v23.16,10.67 26.72,10.67 27.43,9.96 29.06,9.96 29.87,10.77 v31.8,10.77
RELAY2  (via drill 0.3)
  Top 0.203: U9.33 23.65,9.84 v23.88,10.06 | v31.29,10.06 31.19,10.16 31.19,16.05 31.6,16.46 31.6,19.51 33.22,21.13 33.22,22.55 33.25,22.55 R7.1
  Bottom 0.203: v23.88,10.06 24.08,10.26 26.52,10.26 27.23,9.55 29.26,9.55 29.77,10.06 v31.29,10.06
SAFETY  (via drill 0.3)
  Top 0.203: U9.41 25.41,7.94 v25.4,7.92 | v11.89,10.06 v11.89,16.56 | 4.81,30.58 X2.1 3.22,30.61 v3.15,30.68 | R2.1 8.8,27.39 v9.35,27.94
  Route15 0.203: v3.15,30.68 4.17,30.68 4.67,30.18 4.67,28.85 6.3,27.23 8.64,27.23 v9.35,27.94 9.86,27.43 9.86,20.93 11.89,18.9 v11.89,16.56
  Bottom 0.203: v25.4,7.92 24.99,7.52 14.43,7.52 v11.89,10.06
SERVO_OC_DETECT  (via drill 0.3)
  Top 0.203: U4.3 16.9,20.36 16.66,20.12 16.66,17.98 14.73,16.05 14.73,10.57 14.73,10.46 v14.53,10.26 | v20.32,10.26 20.15,10.09 U9.26
  Bottom 0.203: v20.32,10.26 v14.53,10.26
SERVO_PWR_EN  (via drill 0.3)
  Top 0.203: U9.4 23.67,13.19 v23.67,11.48 | v13.31,11.07 v13.31,16.56 | v15.04,21.23 15.04,20.38 U4.4
  Route15 0.203: v13.31,16.56 13.31,18.8 15.04,20.52 v15.04,21.23
  Bottom 0.203: v23.67,11.48 22.96,11.48 22.05,10.57 21.13,10.57 20.73,10.97 13.41,10.97 v13.31,11.07
USART1_RX  (via drill 0.3)
  Top 0.203: J13.2 22.65,2.84 U9.31 22.65,5.79 v22.55,5.89 | L9.1 30.99,4.57 30.79,4.37 v30.07,4.37
  Bottom 0.203: v30.07,4.37 29.16,4.37 27.64,5.89 v22.55,5.89
USART1_TX
  Top 0.203: U9.30 22.15,3.46 21.23,2.54 20.02,2.54 19.78,2.31 J13.1
USART3_RX
  Top 0.203: U6.6 13.46,4.27 17.88,4.27 18.9,5.28 18.9,6.6 18.57,6.94 U9.22
VDD_3V3  (via drill 0.3, 0.5)
  Top 0.203: U9.1 25.17,13.21
  Top 0.254: 24.79,2.85 25.15,3.21 U9.36 | U9.48 25.81,12.53 v25.81,13.01 | U9.9 21.15,14.14 v21.23,14.22 | C10.1 17.56,5.6 U9.24 | 25.17,13.21 25.6,13.21 v25.81,13.01 | v25.81,13.01 26.01,13.21 26.66,13.21 C8.1 | R2.2 v11.68,26.92
  Top 0.381: C9.1 24.29,1.03 v24.79,1.52 24.79,2.85 | U2.1 U2.2 14.55,8.96 v14.53,8.94 | U6.5 12.29,2.58 LED3.A LED2.A LED1.A v15.44,3.45 | U5.4 U5.5 30.44,27.84 | C3.1 28.89,28.12 v28.86,28.15
  Top 0.406: v17.27,4.98 16.98,4.98 C10.1 | U7.3 37.01,12.57 v36.98,12.6
  Top 0.635: 28.89,28.12 30.11,28.12 U5.5
  Top 1.016: U10.2 v20.73,24.49 22.48,24.49 C11.A
  Bottom 0.381: MICROSD.4 29.77,27.24 v28.86,28.15
  other vias: 14.12,24.49 12.5,26.92 13.31,26.92 14.83,26.62 14.12,25.3 14.12,26.11 14.12,23.67 14.12,22.86 14.83,23.27 14.83,24.08 14.83,24.89 14.83,25.7 14.83,22.45 14.12,26.92
  pour Route15 (isolate 0.305): 10.77,30.48 10.77,0.2 38.1,0.2 38.1,30.48
  pour Top (no thermals): 11.07,23.06 11.07,26.82 11.48,27.23 14.83,27.23 15.24,26.82 15.24,22.45 14.94,22.15 14.12,22.15 13.61,22.66 11.48,22.66
VDD_5V  (via drill 0.3, 0.5)
  Top 0.254: L3.1 42.67,34.2 v42.67,33.12 | 34.07,27.64 U1.5
  Top 0.381: v34.24,31.09 34.25,31.11 | U1.5 34.24,27.8 | v46.94,3.45 46.99,3.51
  Top 0.635: 34.25,31.11 U3.5 | J1.2 43.28,3.47 | v16.36,21.95 16.36,26.01 17.14,26.8 U10.3 | D1.CATHODE 12.9,17.78 | 12.9,17.78 13.72,17.78 v14.12,17.37 | U4.5 13.58,18.46 12.9,17.78 | F1.1 36.51,2.98 v37.08,3.56 | v33.43,27.64 34.07,27.64
  Top 0.813: U10.3 20.6,26.8 v21.74,27.94 21.74,28.72 D2.C
  Top 1.016: J1.2 46.99,3.51 J1.1
  Route15 0.254: v46.94,3.45 46.84,3.45 | v42.67,33.12 42.06,32.51 42.06,30.28
  Route15 0.635: v34.24,31.09 34.24,29.97 34.24,28.45 v33.43,27.64 | v14.12,17.37 16.36,19.61 v16.36,21.95 | v37.08,3.56 37.9,4.37 45.92,4.37 46.84,3.45
  Route15 1.016: v46.94,3.45 47.55,3.45 48.87,4.78 48.87,25.91 47.95,26.82 45.52,26.82 42.06,30.28 37.59,30.28 37.29,29.97 34.24,29.97 23.06,29.97 21.74,28.65 v21.74,27.94
VDD_5V_ANALOG  (via drill 0.3)
  Top 0.254: L3.2 43.93,33.18 v43.99,33.12
  Bottom 0.254: v43.99,33.12 45.15,31.96 J5.1
VDD_SERVO  (via drill 0.3, 0.5)
  Top 0.381: U2.24 U2.23 | D1.ANODE 10.37,16.96 11.18,16.15 v11.18,10.36 | v8.53,8.23 9.87,8.23 U2.24 | C1.1 8.64,7 U2.24 | U4.1 17.68,18.49
  Top 0.508: v19,18.29 18.8,18.49 17.68,18.49 17.29,18.49
  Top 0.635: D1.ANODE 10.09,18.06 v10.09,18.8 L1.2
  Bottom 0.381: v8.53,8.23 9.04,8.23 v11.18,10.36
  Bottom 0.635: v19,18.29 18.8,18.49 10.4,18.49 v10.09,18.8
VDD_SERVO_EXT  (via drill 0.5)
  Top 0.61: L1.1 8.79,18.84 v8.84,18.8
  Top 0.635: 3.71,5.13 J16.2
  Top 1.016: J4.2 2.85,2.13 2.85,4.27 3.71,5.13 | J16.2 J16.5 J16.8 J16.11 J16.14 J16.17 J16.20 J16.23
  Route15 0.254: v8.84,18.8 8.84,19.81 7.26,21.39 5.03,21.39 3.76,20.12 5.03,18.85 | 5.03,18.85 8.79,18.85 v8.84,18.8 | v8.84,18.8 8.84,17.88 7.26,16.31 5.03,16.31 3.76,17.58 5.03,18.85
  Bottom 0.254: J16.20 3.76,20.12 | 3.76,20.12 5.03,18.85 | 5.03,18.85 8.79,18.85 v8.84,18.8 | 3.76,20.12 5.03,21.39 7.26,21.39 8.84,19.81 v8.84,18.8 | v8.84,18.8 8.84,17.88 7.26,16.31 5.03,16.31 3.76,17.58 5.03,18.85
VIN  (via drill 0.3, 0.5)
  Top 0.254: L2.2 5.69,25.5 v5.54,25.35
  Top 0.813: v21.44,30.38 23.13,30.38 D3.CATHODE
  Top 1.016: U8.1 12.98,32.19 C7.A 12.48,29.46 8.94,29.46 7.84,28.36 J10.1
  Bottom 0.813: U8.1 14.17,32.26 16.05,30.38 v21.44,30.38
  Bottom 1.016: 6-18V.1 5.49,25.3 v5.54,25.35 6.91,26.72 J10.1
VOUT
  Top 0.813: D2.A 22.15,32.41 | 22.15,32.41 22.15,32.51 U8.3 | D3.ANODE 23.77,31.9 23.37,32.31 22.25,32.31 22.15,32.41

## Text on the board
tPlace: +5V | GND
tDocu: S1 | S8
bDocu: RST | BOOT